# EAGLE board watch smd (EAGLE 6.1)
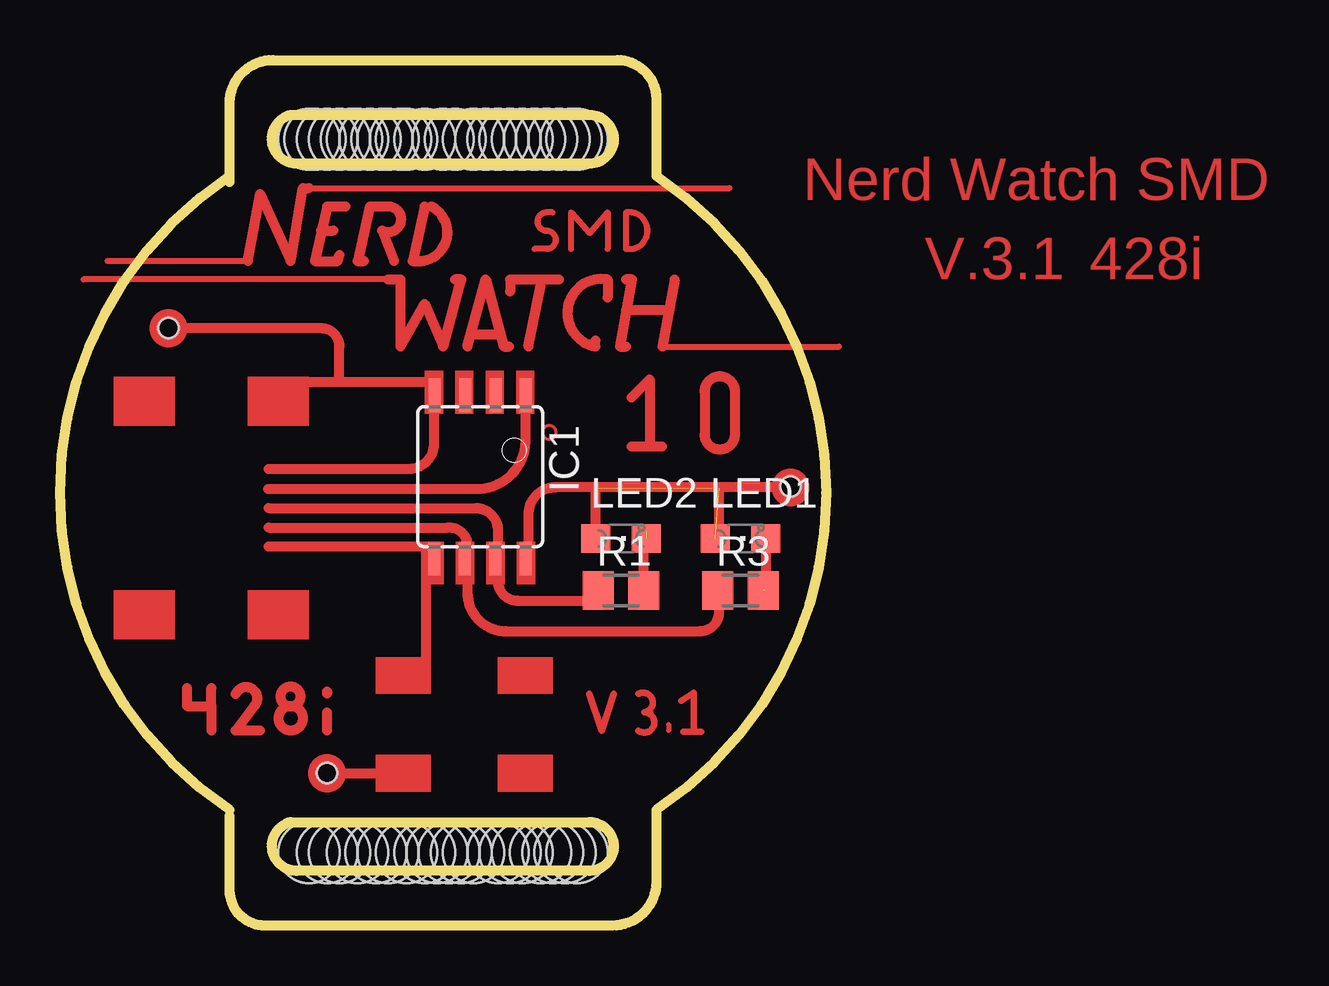
[diagram p0: board, top side]
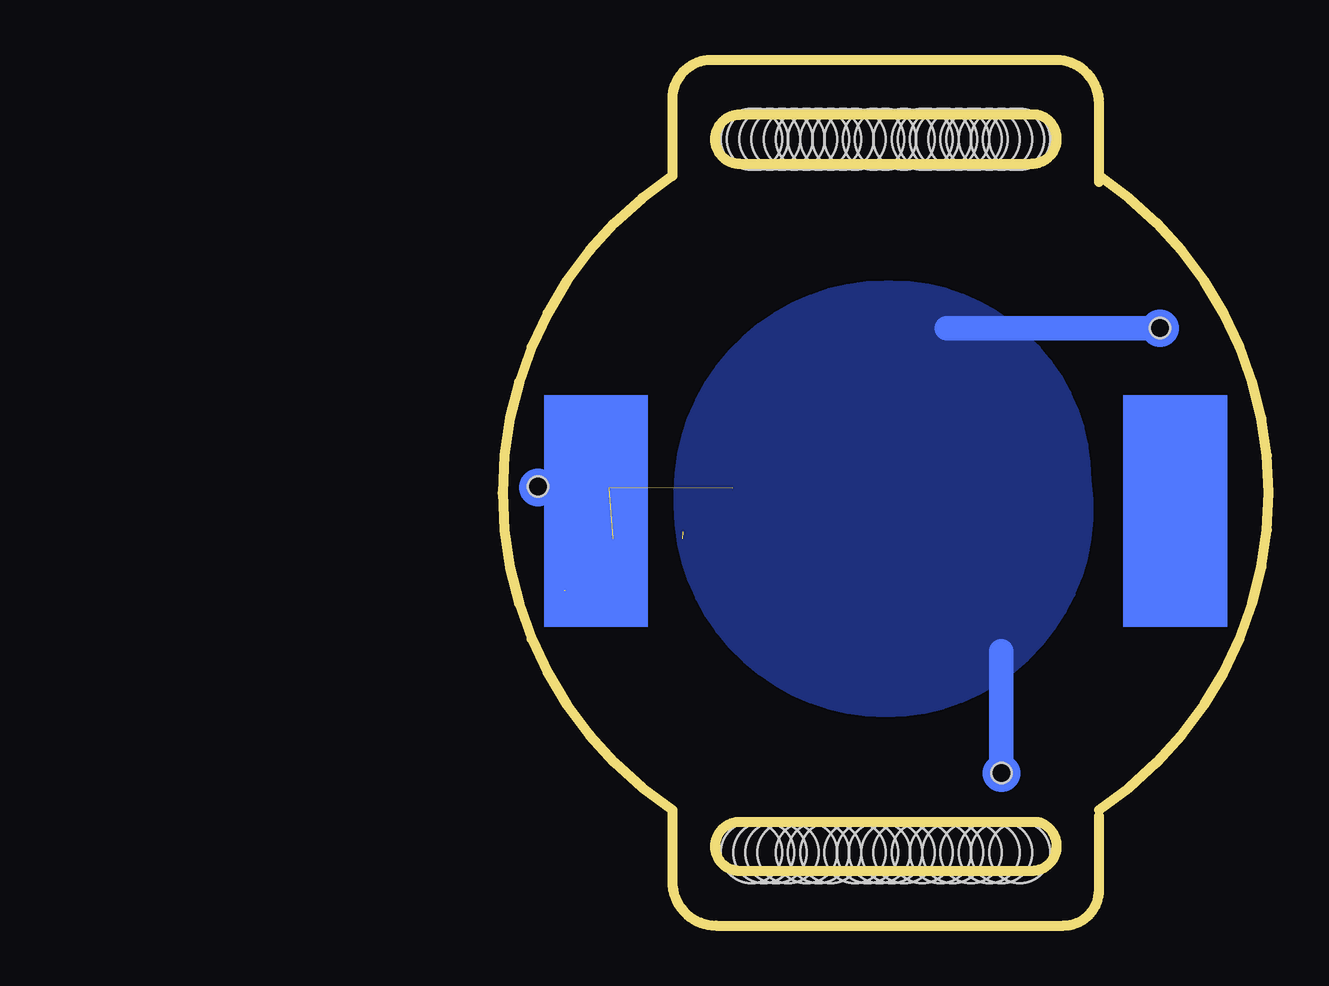
[diagram p1: board, bottom side, seen from below]

Size 31.92 x 36.07 mm. Coordinates in mm from the lower left corner, seen from the top.
Outline: 7.07,30.99 7.07,31.24
Outline: 7.07,31.24 7.07,34.27 arc-90 8.86,36.07 23.22,36.07 arc-90 24.85,34.44 24.85,31.24 arc-113 24.85,4.83 24.85,1.83 arc-90 23.02,0 8.55,0 arc-90 7.07,1.48 7.07,4.57
Outline: 7.07,4.83 arc-113 7.07,31.24
Outline: 9.61,33.78 22.05,33.78 arc-180 22.05,31.75 9.86,31.75 arc-166 9.61,33.78
Outline: 9.61,4.32 22.05,4.32 arc-180 22.05,2.29 9.86,2.29 arc-166 9.61,4.32
Copper layers (1*16): Top 0.035mm / dielectric 1.5mm / Bottom 0.035mm
Design rules: minimum track width 10mil, minimum drill 24mil, track to track 8mil, track to pad 8mil, pad to pad 8mil, via to via 8mil, smd to smd 8mil, copper to edge 40mil, drill to drill 8mil, minimum pad ring 10mil, minimum via ring 8mil, stop-mask expansion 4mil, vias tented up to drill 0mil, thermal gap 10mil
Holes 2.54 mm at 10.37,3.05 21.55,3.05 12.4,3.05 14.43,3.05 16.21,3.05 18.24,3.05 20.02,3.05 21.55,32.77 20.28,32.77 18.75,32.77 17.23,32.77 15.2,32.77 13.42,32.77 12.15,32.77 10.37,32.77 11.13,3.05 11.64,3.05 13.16,3.05 13.67,3.05 15.2,3.05 15.7,3.05 17.23,3.05 16.72,3.05 18.75,3.05 19.26,3.05 20.53,3.05 21.04,3.05 10.62,32.77 11.13,32.77 11.64,32.77 12.4,32.77 12.91,32.77 13.67,32.77 14.18,32.77 14.43,32.77 15.96,32.77 16.47,32.77 17.74,32.77 18.24,32.77 19.26,32.77 19.77,32.77 21.29,32.77 20.78,32.77
Holes 0.84 mm at 11.13,6.35 4.53,24.89 30.44,18.29

## Footprints (pad centres in the part's own frame; a part is rotated, then mirrored left to right if it is on the bottom)
8S2 = smd 0.5 x 1.4: 1 -1.905,-3.404; 2 -0.645,-3.404; 3 0.625,-3.404; 4 1.895,-3.404; 5 1.905,3.404; 6 0.635,3.404; 7 -0.635,3.404; 8 -1.905,3.404
CHIPLED_0805 = smd 1.2 x 1.2: A 0,-1.05; C 0,1.05
M0805 = smd 1.3 x 1.6: 1 -0.95,0; 2 0.95,0

## Placement (x,y rotation side)
IC1  TINY13-20SU  [8S2]  17.51,18.69 180 top
LED1  [CHIPLED_0805]  28.35,16.13 270 top
LED2  [CHIPLED_0805]  23.38,16.13 270 top
R1  [M0805]  23.38,13.97 0 top
R3  [M0805]  28.35,13.97 0 top

## Library data of the parts
IC1 = atmel; MPN: ATTINY13-20SU; OC_FARNELL: 9171568; OC_NEWARK: 96K6522
LED1 LED2 = led
R1 R3 = resistor

## Nets
3.3V: LED1.A LED2.A
GND: IC1.4
N$1: LED2.C R1.2
N$2: R3.1
N$4: R1.1
N$6: LED1.C R3.2
VCC: IC1.8

## Tracks (layer width: path | path; a pad name or v marks a point on that pad's centre or on a via)
3.3V  (2 unrouted)
  Top 0.406: 27.46,18.25 27.31,18.26 | LED2.A 22.33,18.23 22.33,18.26
N$1  (1 unrouted)
  Top 0.406: R1.2 24.33,16.32 24.42,16.41
N$3
  Top 0.406: 23.81,22 24.57,22.76 24.57,19.96
N$5
  Top 0.406: 9.76,22.66 11.64,22.66 | 11.64,22.66 15.43,22.66 | 11.64,22.66 11.64,24.14 arc90 10.89,24.89 4.53,24.89
N$6  (1 unrouted)
  Top 0.406: LED1.C 29.4,14.03 29.34,13.97
N$9
  Top 0.406: 30.44,18.26 20.65,18.26 arc90 19.51,17.13 19.51,15.57
N$10
  Top 0.406: 11.13,6.35 13.85,6.35
  Top 0.508: 13.85,6.35 13.85,6.38
N$11
  Top 0.406: 8.69,17.4 17.34,17.4 arc-90 18.24,16.45 18.24,14.36 arc90 19.06,13.54 22.11,13.54
N$12
  Top 0.406: 8.69,16.59 16.14,16.59 arc-90 16.97,15.91 16.97,15.75
N$14
  Top 0.406: 8.69,15.8 15.73,15.8
N$15
  Top 0.406: 15.25,15.77 15.25,10.16
N$16
  Top 0.406: 26.86,22.25 26.86,20.47 arc180 28.13,20.47 28.13,22.25 arc180 26.86,22.25
N$17
  Top 0.406: 23.81,19.96 25.08,19.96
N$18
  Top 0.406: 5.29,9.91 5.29,9.14 6.31,9.14 | 6.31,9.14 6.31,9.91 | 6.31,9.14 6.31,8.13
N$19
  Top 0.406: 8.34,8.13 7.32,8.13 8.08,9.14 arc203 7.32,9.65
N$20
  Top 0.406: 11.13,8.13 11.13,8.89
N$21
  Top 0.406: 11.13,9.75 11.13,9.68
N$22
  Top 0.279: 26.4,8.13 26.4,9.7 25.89,9.37
N$23
  Top 0.406: 16.97,15.24 16.97,13.86 arc90 18.57,12.27 26.67,12.27 arc90 27.46,13.06 27.46,13.82
N$24
  Top 0.254: 20.53,29.72 20.28,29.72 arc180 20.28,28.96 arc-180 20.28,28.19 19.77,28.19
N$25
  Top 0.254: 13.67,26.92 0.97,26.92
N$26
  Top 0.279: 22.05,9.65 22.56,8.13 23.07,9.65
N$27
  Top 0.279: 24.34,8.89 arc203 24.09,9.65 | 24.59,8.89 24.34,8.89 | 24.34,8.89 arc-217 24.09,8.13
N$28
  Top 0.203: 25.36,8.38 25.36,8.13
N$29
  Top 0.254: 7.83,27.69 1.99,27.69
  Top 0.406: 7.83,27.69 8.34,30.48 9.61,27.69 10.12,30.73 10.37,30.73
N$30
  Top 0.254: 10.37,30.73 27.9,30.73
N$31
  Top 0.254: 21.29,28.19 21.29,29.72 22.08,28.85 22.82,29.72 22.82,28.19
N$32
  Top 0.254: 23.58,29.72 23.58,28.19 23.83,28.19 arc161 23.83,29.72 23.58,29.72
N$33
  Top 0.406: 11.64,27.94 11.56,27.69 10.62,27.69 11.13,29.97 11.89,29.97
N$34
  Top 0.406: 10.88,28.96 11.39,28.96
N$35
  Top 0.406: 13.93,27.69 13.42,28.96 arc208 13.67,29.97 12.91,29.97 12.4,27.69 12.66,27.69
N$36
  Top 0.406: 15.2,29.97 14.69,27.69 14.94,27.69 arc155 15.45,29.97
N$37
  Top 0.406: 13.67,26.92 14.18,26.92 14.18,24.13 15.2,25.91 15.96,24.13 16.72,26.92 16.47,26.92
N$38
  Top 0.406: 16.97,24.13 17.74,26.92 18.5,24.13 18.7,24.13
N$39
  Top 0.406: 17.23,24.64 18.24,24.64
N$40
  Top 0.406: 19.51,24.13 20.02,26.67
N$41
  Top 0.406: 20.78,26.92 18.75,26.92 18.75,26.42
N$42
  Top 0.406: 22.31,24.38 22.31,24.13 arc-180 22.82,26.92 22.82,26.16
N$43
  Top 0.406: 23.58,26.92 23.83,26.92 23.32,24.13 23.58,24.13
N$44
  Top 0.406: 23.58,25.65 25.1,25.65
N$45
  Top 0.254: 25.1,24.13 32.47,24.13
  Top 0.406: 25.61,26.92 25.1,24.13
N$48
  Bottom 1.016: 4.53,24.89 13.42,24.89 | 11.13,11.43 11.13,6.35
  pour Bottom: 7.58,18.54 arc-90 15.7,26.67 15.96,26.67 arc-90 24.59,18.03 24.59,17.53 arc-90 15.96,8.89 arc-98
N$49
  Top 0.279: 25.97,8.08 26.73,8.08
N$536
  Top 0.406: 19.39,22.02 19.39,20.16 arc-90 17.31,18.19 8.67,18.19
S$1
  Top 0.406: 15.58,22.02 15.58,20.09
S$2
  Top 0.406: 15.58,20.09 arc-90 14.54,19.02 8.69,19.02
S$3
  Top 0.406: 27.46,16.18 27.46,18.24
(copper drawn outside any net)
  shapes: Bottom area x2, Bottom circle x3, Top area x16, Top circle x5

## Text on the board
Top: Nerd Watch SMD | V.3.1 | 428i | °